# Altium PCB FSFB_SMPS.PcbDoc (part 2 of 2)
Units mm, origin at the board's own origin, x right, y up, seen from the top; angles counter-clockwise.
Board outline 100 x 100 mm, 2 copper layers (Top Layer, Bottom Layer); 97 components, 60 nets, 269 pads, 45 vias.
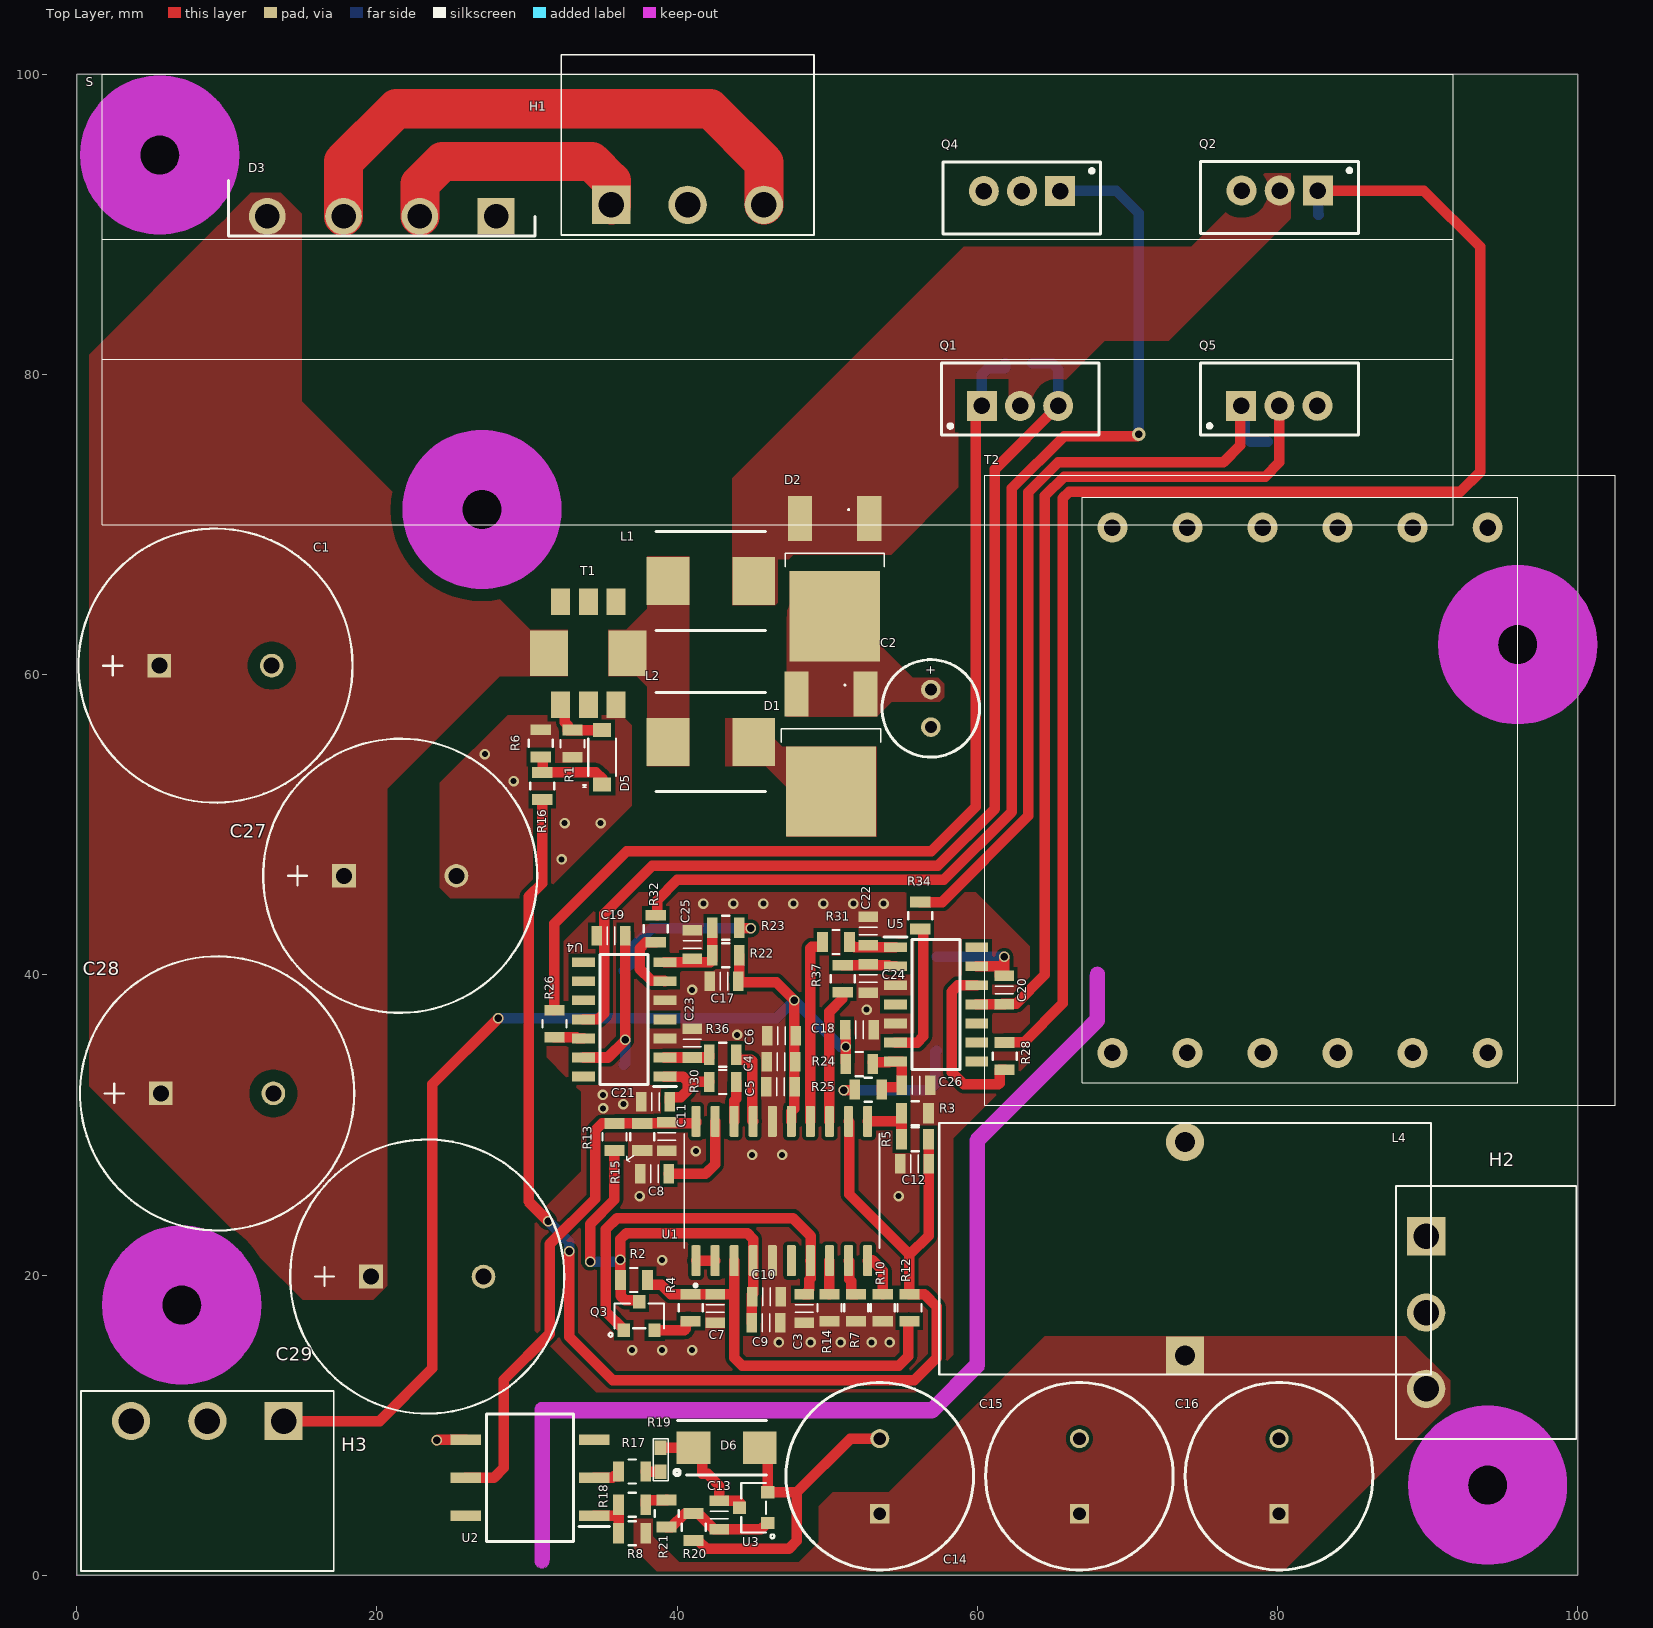
[diagram p0: Top Layer view]

## Via types
v1: diameter 0.7, hole 0.4, Top Layer to Bottom Layer, 32 vias
v2: diameter 0.7, hole 0.5, Top Layer to Bottom Layer, 12 vias
v3: diameter 0.9, hole 0.5, Top Layer to Bottom Layer, 1 vias

## Nets (pads, with @x,y where several pads share a name; then routed paths per layer and width w, separated by ;. In a path a pad name is that pad's centre, name@x,y a point inside that pad or via, vN(x,y) a via of type N, cw(c..) or ccw(c..) an arc to the next point about the centre after c; other vN are vias at no path point) (continued)
NetR32_1: (continued)
  Top Layer w0.7: R32.1 38.569,42.168 37.914,42.168 37.496,41.75 37.496,40.404 38.302,39.598 39.157,39.598 U4.6
NetR34_1: R34.1 U5.6 | length 9.4
  Top Layer w0.7: U5.6 55.99,35.489 56.4,35.899 56.4,43.043 56.394,43.048 R34.1
RAMP: C7.2 R2.1 R4.1 R12.2 U1.3 | length 27.3
  Top Layer w0.7: R2.1 38.027,19.357 38.032,19.352 38.948,19.352 39.575,18.725 40.9,18.725 C7.2 43.725,18.725 43.8,18.8 ; U1.3 43.8,18.8 ; R12.2 55.406,16.923 55.4,16.918 55.4,14.6 54.754,13.954 44.346,13.954 43.8,14.5 43.8,18.8
RectACLine: C1.1 C27.1 C28.1 C29.1 D3.4 T1.8
REF: C9.2 C10.2 Q3.3 R2.2 R13.2 U1.4 | length 30.1
  Top Layer w0.7: v2(34.2,20.9) 34.2,23.4 35.825,25.025 R13.2 ; Q3.3 37.475,18.258 37.419,18.314 36.544,18.314 36.229,18.63 36.229,19.669 R2.2 v2(36.223,21.03) 36.223,22.384 36.639,22.8 44.66,22.8 45.07,22.39 U1.4 45.07,18.776 44.984,18.69 C9.2
  Bottom Layer w0.7: v2(34.2,20.9) 36.094,20.9 v2(36.223,21.03)
pads on no net: D7.1 D8.1 H1.2 H2.2 H3.2 T1.2 T1.4 T1.5 T1.6 T2.2 T2.3 T2.4 T2.5 T2.8 T2.11 U1.6 U2.3 U2.6 U4.4 U4.8 U4.9 U4.10 U4.14 U5.4 U5.8 U5.9 U5.10 U5.14

## Polygon pours and split planes (outlines as drawn)
140V_GND on Bottom Layer "140V_GND_L02_P039" (solid, pour order 39): 60.475,25.125 93.15,25.125 99.35,18.925 99.35,3.775 95.575,0 36.275,0 35.25,1.025 35.25,10.075 35.8,10.625 56.9,10.625 60,13.725 60,24.65
NetD8_2 on Bottom Layer "NETD8_2_L02_P038" (solid, pour order 38): 95.85,36.025 98.875,33 98.875,25.75 92.75,25.75 92.075,26.425 92.075,34.85 93.25,36.025
NetL4_2 on Bottom Layer "NETL4_2_L02_P037" (solid, pour order 37): 72.575,29.6 79.1,36.125 84.925,36.125 85.4,35.65 85.4,32.675 80.075,27.35 73.3,27.35 72.575,28.075
NetD7_2 on Bottom Layer "NETD7_2_L02_P036" (solid, pour order 36): 63.875,31.2 63.875,25.725 70.195,25.725 70.4,25.93 70.4,35.3 69.65,36.05 68.725,36.05
GND_IC on Bottom Layer "GND_IC_L02_P033" (solid, pour order 33): 33.6,32.2 31.3,34.5 31.3,41.1 35.7,45.5 59.9,45.5 63.5,41.9 63.5,34.2 58.4,29.1 58.4,14.7 55.9,12.2 34.6,12.2 30.5,16.3 30.5,23.8 33.6,26.9
GND_HV on Bottom Layer "tga" (solid, pour order 28): 51.7,96 51.7,91.6 48.8,88.7 29.8,88.7 29.2,89.3 29.1,91.8 26.6,91.8 26.6,89.1 20,82.5 6.2,82.5 0.1,76.4 0.1,0 27.8,0 30.1,2.3 30.1,24.1 32.5,26.5 32.5,32.4 30.8,34.1 30.8,41.9 34.8,45.9 64.7,45.9 66.9,48.1 66.9,70.4 68.4,71.9 96.8,71.9 99.3,74.4 99.3,95.6 95.5,99.4 55.1,99.4
HSCD on Bottom Layer "HSCD_L02_P025" (solid, pour order 25): 61.5,85.1 64.5,82.1 64.45,74.05 67.125,71.375 67.125,69.575 68.3,68.4 69.7,68.4 70.7,69.4 70.7,73.05 69.25,74.5 69.25,85.75 64.5,90.5 64.5,92.75 63.75,93.5 62.25,93.5 61.5,92.75
NetD4_2 on Bottom Layer "NETD4_2_L02_P022" (solid, pour order 22): 95.4,73.7 92.5,70.8 92.5,69 93.4,68.1 97,68.1 98.4,69.5 98.4,96.3 97.5,97.2 95.4,97.2
NetD2_1 on Bottom Layer "NETD2_1_L02_P024" (solid, pour order 24): 79.1,91.4 79.509,90.991 80.661,90.991 81.428,91.758 81.428,93.499 82.129,94.2 91,94.2 91,97.4 82.3,97.4 79.1,94.2
HSAB on Bottom Layer "HSAB_L02_P026" (solid, pour order 26): 76.5,90 79,87.5 79,77.5 79.75,76.75 80.75,76.75 81.25,77.25 81.25,80 85.75,84.5 89.5,84.5 90,85 90,88.25 89,89.25 79.75,89.25 78.75,90.25 78.75,92.75 78.25,93.25 77,93.25 76.5,92.75
GND_HV on Top Layer "GND_HV_L01_P035" (solid, pour order 35): 24.2,52.8 28.7,57.3 36.3,57.3 36.962,56.638 36.962,51.262 30.8,45.1 24.9,45.1 24.2,45.8
GND_IC on Top Layer "GND_IC_L01_P034" (solid, pour order 34): 33.6,32.2 31.3,34.5 31.3,41.1 35.7,45.5 59.9,45.5 63.5,41.9 63.5,34.2 58.4,29.1 58.4,14.7 55.9,12.2 34.6,12.2 30.5,16.3 30.5,23.8 33.6,26.9
140V_OUT on Top Layer "140V_OUT_L01_P040" (solid, pour order 40): 37.125,3.773 38.374,3.773 38.374,2.603 40.127,0.85 48.1,0.85 49.45,2.2 49.45,4.6 50.375,5.525 54.1,5.525 64.5,15.925 88.55,15.925 91.5,12.975 91.5,11.4 80.175,0.075 80.175,0.025 38.9,0.025 37.125,1.8
RectACLine on Top Layer "RECTACLINE_L01_P031" (solid, pour order 31): 15.05,18.35 19.75,18.35 20.7,19.3 20.7,52.4 28.2,59.9 32.7,59.9 32.7,63 30.2,63 15,78.2 15,90.7 13.6,92.1 11.6,92.1 0.1,80.6 0.1,33.3
NetC2_1 on Top Layer "NETC2_1_L01_P029" (solid, pour order 29): 53.3,62.2 55.7,59.8 57.4,59.8 57.8,59.4 57.8,58.5 57.5,58.2 54.3,58.2 53.3,57.2 47.293,57.2 47.165,57.328 47.3,57.463 47.3,66.9 52.8,66.9 53.3,66.4
NetD1_2 on Top Layer "NETD1_2_L01_P027" (solid, pour order 27): 43.2,57.1 46,57.1 46,56.2 47,55.2 53.3,55.2 53.3,49.2 47.3,49.2 47.3,52.5 45.9,53.9 43.2,53.9
NetL1_1 on Top Layer "NETL1_1_L01_P030" (solid, pour order 30): 35.4,59.9 37.3,59.9 38,59.2 38,53.9 40.8,53.9 40.8,67.9 38,67.9 38,64.4 36.6,63 35.4,63
NetD2_1 on Top Layer "NETD2_1_L01_P023" (solid, pour order 23): 79.057,93.307 79.15,93.4 81,93.4 81.7,92.7 81.7,91.2 72.75,82.25 68.5,82.25 64.25,78 62.5,78 61.375,76.875 61.375,75.125 54.25,68 47.75,68 46.75,67 46.75,64.84 46.528,64.618 43.681,64.618 43.681,73.081 59.1,88.5 74.25,88.5

## Keep-outs
Keep-Out Layer:
  circle w4: c96,62 r3.3
  circle w4: c27,71 r3.3
  circle w4: c5.534,94.614 r3.3
  circle w4: c94,6 r3.3
  circle w4: c7,18 r3.3
  lines w0.025: 0,0 100,0 100,100 0,100 0,0
  lines w1: 31,1 31,11 57,11 60,14 60,29 67,36 68,37 68,40

## Silkscreen, mask and mechanical layers (free items; w line width, h text height)
Top Overlay:
  lines w0.1: 36.846,27.55 36.65,27.65 ; 37.1,27.95 36.65,27.65 ; 36.65,27.65 36.65,27.9 36.65,27.65

## Text inside footprints (layer, text, board x,y; h text height)
C2: Top Overlay "+" at 57.373,59.972 h1 r90; Mechanical 13 "+" at 57.373,59.972 h1 r90